# EAGLE board Qwiic_keypad (EAGLE 7.7.0)
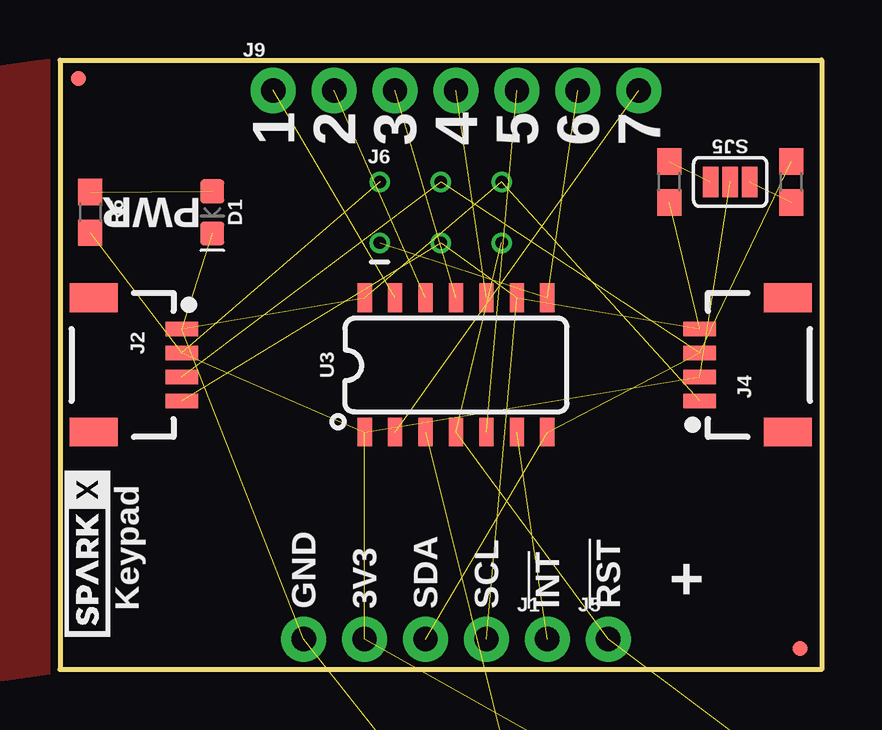
[diagram p0: board, top side]
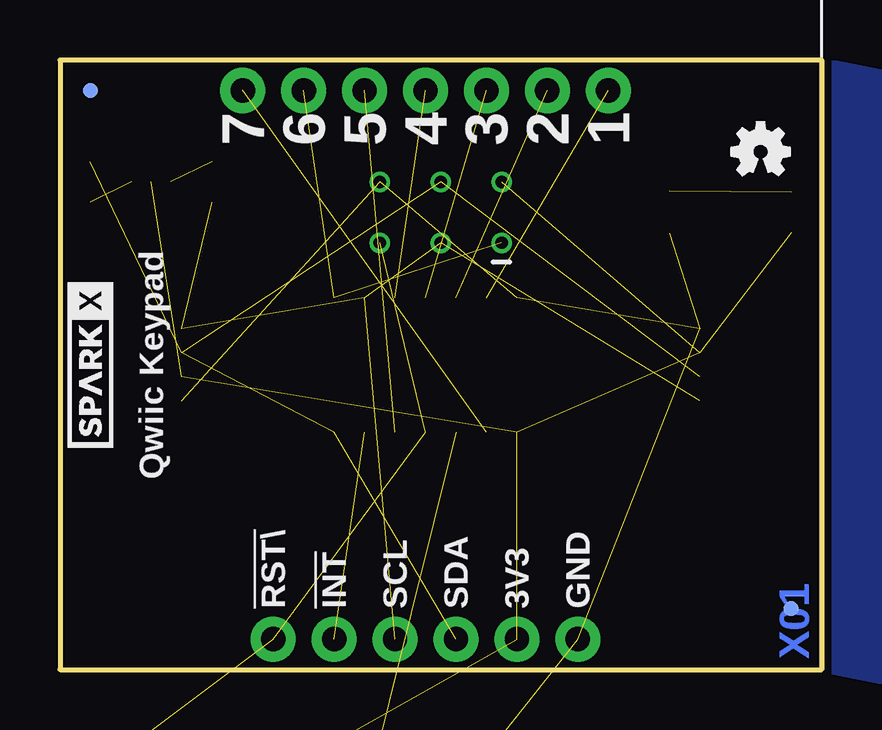
[diagram p1: board, bottom side, seen from below]

Size 31.75 x 25.4 mm. Coordinates in mm from the lower left corner, seen from the top.
Outline: 0,25.4 31.75,25.4 31.75,0 0,0 0,25.4
Copper layers (1*16): Top 0.035mm / dielectric 1.5mm / Bottom 0.035mm
Design rules "SparkFun-2-layer-PCBWay-LIMIT": minimum track width 6mil, minimum drill 0.3mm, track to track 6mil, track to pad 6mil, pad to pad 6mil, via to via 6mil, smd to smd 6mil, copper to edge 6mil, drill to drill 6mil, minimum pad ring 7mil, minimum via ring 7mil, stop-mask expansion 4mil, vias tented up to drill 25mil, thermal gap 10mil

## Footprints (pad centres in the part's own frame; a part is rotated, then mirrored left to right if it is on the bottom)
0603 = smd 1.1 x 1: 1 -0.85,0; 2 0.85,0
LED-0603 = smd 1 x 1: A -0.877,0; C 0.877,0
1X01_NO_SILK = drill 1.016 pad 1.88: 1 0,0
1X04_1MM_RA = smd 0.6 x 1.35: 1 -1.5,0; 2 -0.5,0; 3 0.5,0; 4 1.5,0 | smd 1.2 x 2: NC1 2.8,-3.675; NC2 -2.8,-3.675
1X04_NO_SILK = drill 1.016 pad 1.88: 1 0,0; 2 2.54,0; 3 5.08,0; 4 7.62,0
2X3_TEST_POINTS = drill 0.508: 1 -2.54,-1.27; 2 -2.54,1.27; 3 0,-1.27; 4 0,1.27; 5 2.54,-1.27; 6 2.54,1.27
1X07_NO_SILK = drill 1.016 pad 1.88: 1 0,0; 2 2.54,0; 3 5.08,0; 4 7.62,0; 5 10.16,0; 6 12.7,0; 7 15.24,0
MICRO-FIDUCIAL = smd 0.635 x 0.635: 1 0,0
SMT-JUMPER_2_NC_PASTE_NO-SILK = smd 0.635 x 1.27: 1 -0.406,0; 2 0.406,0
SMT-JUMPER_3_2-NC_PASTE_SILK = smd 0.635 x 1.27: 1 -0.813,0; 2 0,0; 3 0.813,0
SO14 = smd 0.6 x 1.2: 1 -3.175,-2.8; 2 -1.905,-2.8; 3 -0.635,-2.8; 4 0.635,-2.8; 5 1.905,-2.8; 6 3.175,-2.8; 7 4.445,-2.8; 8 4.445,2.8; 9 3.175,2.8; 10 1.905,2.8; 11 0.635,2.8; 12 -0.635,2.8; 13 -1.905,2.8; 14 -3.175,2.8

## Placement (x,y rotation side)
C4  0.1uF  [0603]  25.4,-6.35 180 top  (outside the outline)
D1  RED  [LED-0603]  6.35,19.05 270 top
FRAME1  FRAME-LETTER  [CREATIVE_COMMONS]  -16.51,-49.53 0 top  (outside the outline)
J1  [1X01_NO_SILK]  20.32,1.27 0 top
J2  SMD  [1X04_1MM_RA]  5.08,12.7 270 top
J3  PTH  [1X04_NO_SILK]  10.16,1.27 0 top
J4  SMD  [1X04_1MM_RA]  26.67,12.7 90 top
J5  [1X01_NO_SILK]  22.86,1.27 0 top
J6  AVR_SPI_PROG_3X2TESTPOINTS  [2X3_TEST_POINTS]  15.88,19.05 0 top
J9  [1X07_NO_SILK]  8.89,24.13 0 top
JP1  FIDUCIALUFIDUCIAL  [MICRO-FIDUCIAL]  30.48,24.13 0 bottom
JP2  FIDUCIALUFIDUCIAL  [MICRO-FIDUCIAL]  30.86,0.89 0 top
JP3  FIDUCIALUFIDUCIAL  [MICRO-FIDUCIAL]  1.27,2.54 0 bottom
JP5  JUMPER-SMT_2_NC_PASTE_NO-SILK  [SMT-JUMPER_2_NC_PASTE_NO-SILK]  30.48,-4.45 0 top  (outside the outline)
JP6  FIDUCIALUFIDUCIAL  [MICRO-FIDUCIAL]  0.76,24.64 0 top
LOGO1  OSHW-LOGOMINI  [OSHW-LOGO-MINI]  2.54,21.59 0 bottom
R1  4.7k  [0603]  35.56,-7.62 0 top  (outside the outline)
R2  2.2k  [0603]  25.4,20.32 90 top
R3  10k  [0603]  19.05,-8.89 0 top  (outside the outline)
R4  2.2k  [0603]  30.48,20.32 270 top
R6  1k  [0603]  1.27,19.05 270 top
SJ5  [SMT-JUMPER_3_2-NC_PASTE_SILK]  27.94,20.32 0 top
U3  ATTINY84  [SO14]  15.88,12.7 0 top
U$1  SPARKX-LOGO3  [SPARKX-SMALL]  30.48,12.7 90 bottom
U$2  SPARKX-LOGO3  [SPARKX-SMALL]  1.14,4.83 90 top

## Library data of the parts
C4 = SparkFun-Capacitors; PROD_ID: CAP-00810
D1 = SparkFun-LED; PROD_ID: DIO-00819
FRAME1 LOGO1 = SparkFun-Aesthetics
J1 J5 J6 J9 = SparkFun-Connectors
J2-J4 U$1 U$2 = SparkX
JP1-JP3 JP6 = SparkFun
JP5 SJ5 = SparkFun-Jumpers
R1-R4 R6 = SparkFun-Resistors; PROD_ID: RES-08272
U3 = SparkFun-IC-Microcontroller; PROD_ID: IC-11285

## Nets
1: J9.1 U3.13
2: J9.2 U3.12
3: J9.3 U3.11
3.3V: C4.1 J2.2 J3.2 J4.2 J6.2 JP5.2 R1.2 R6.2 SJ5.2 U3.1
4: J9.4 U3.10
5: J9.5 U3.5
7: J9.7 U3.2
!INT: J1.1 U3.6
!RST: J5.1 J6.5 R1.1 U3.4
ADD1: JP5.1 R3.2 U3.3
GND: C4.2 D1.C J2.1 J3.1 J4.1 J6.6 R3.1 U3.14
MISO/6: J6.1 J9.6 U3.8
N$1: D1.A R6.1
SCL: J2.4 J3.4 J4.4 J6.3 R2.1 U3.9
SCL_PU1: R2.2 SJ5.1
SDA: J2.3 J3.3 J4.3 J6.4 R4.1 U3.7
SDA_PU1: R4.2 SJ5.3

## Tracks (layer width: path | path; a pad name or v marks a point on that pad's centre or on a via)
1  (1 unrouted)
2  (1 unrouted)
3  (1 unrouted)
3.3V  (9 unrouted)
4  (1 unrouted)
5  (1 unrouted)
7  (1 unrouted)
!INT  (1 unrouted)
!RST  (3 unrouted)
ADD1  (2 unrouted)
GND  (7 unrouted)
  pour Bottom (isolate 0.305): 0,0 0,25.4 -6.35,24.13 -6.35,-1.27
  pour Top (isolate 0.305): 0,0 0,25.4 -8.89,24.13 -8.89,-1.27
MISO/6  (2 unrouted)
N$1  (1 unrouted)
SCL  (5 unrouted)
SCL_PU1  (1 unrouted)
SDA  (5 unrouted)
SDA_PU1  (1 unrouted)

## Text on the board
Bottom: X01
tPlace: 1 | 2 | 3 | 4 | 5 | 6 | 7 | PWR | Keypad | + | GND | 3V3 | SDA | SCL | !INT | !RST
bPlace: 1 | 2 | 3 | 4 | 5 | 6 | 7 | Qwiic Keypad | GND | 3V3 | SDA | SCL | !INT | !RST\
tDocu: Kevin Kuwata